# Altium PCB charging_board.PcbDoc
Units mm, origin at the board's own origin, x right, y up, seen from the top; angles counter-clockwise.
Board outline 35.32 x 30 mm, 2 copper layers (Top Layer, Bottom Layer); 2 components, 2 nets, 4 pads, 38 vias.
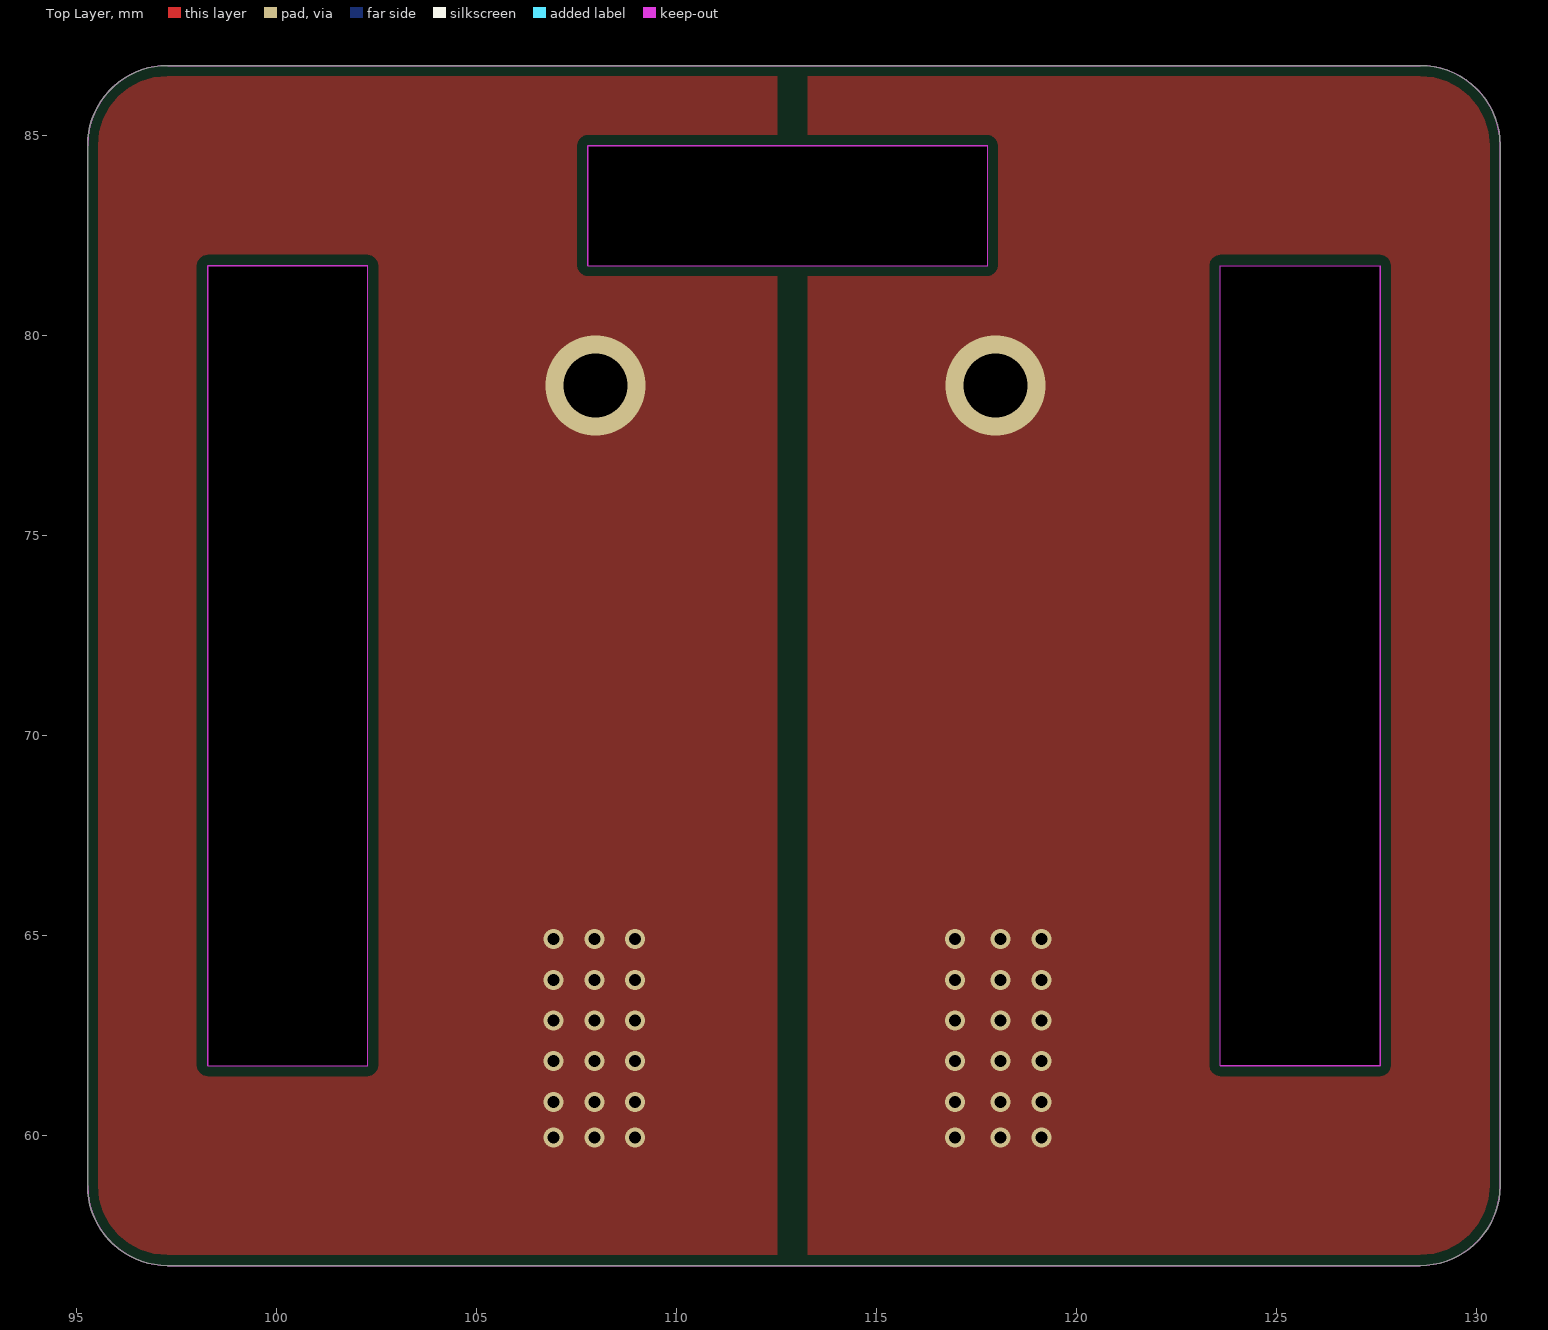
[diagram p0: Top Layer view]
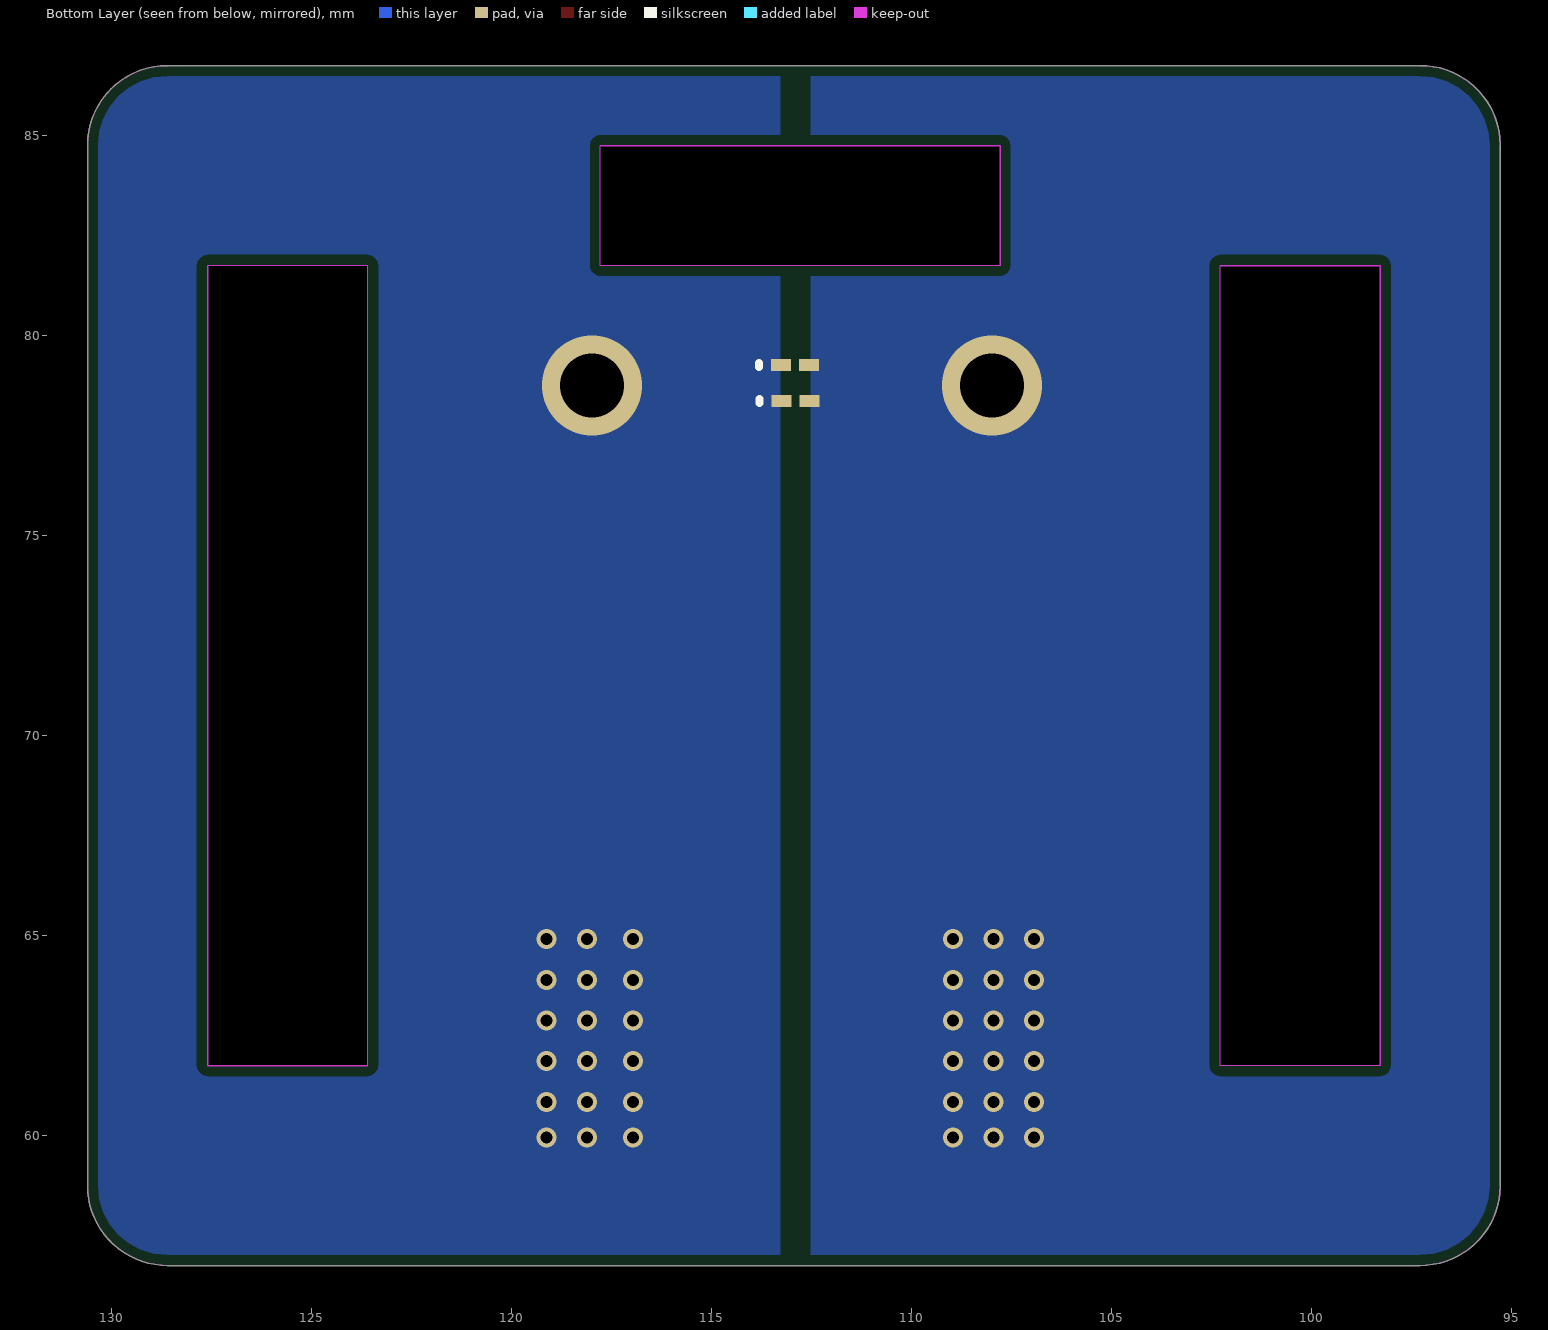
[diagram p1: Bottom Layer view, seen from below]

## Layer stack, top to bottom
Top Solder: solder mask 0.0102, Solder Resist, Dk 3.5
Top Layer: signal copper 0.0356
Dielectric 1: dielectric 0.32, FR-4, Dk 4.8
Bottom Layer: signal copper 0.0356
Bottom Solder: solder mask 0.0102, Solder Resist, Dk 3.5

## Board outline
95.28,58.74 ccw(c97.28,58.74) 97.28,56.74 128.598,56.74 ccw(c128.598,58.74) 130.598,58.74 130.598,84.74 ccw(c128.598,84.74) 128.598,86.74 97.28,86.74 ccw(c97.28,84.74) 95.28,84.74
cut-out: 123.598,61.74 123.598,81.74 127.598,81.74 127.598,61.74
cut-out: 107.78,81.74 117.78,81.74 117.78,84.74 107.78,84.74
cut-out: 98.28,61.74 102.28,61.74 102.28,81.74 98.28,81.74

## Design rules (kind name [scope] priority, off if disabled: settings)
Clearance [All] p1: gap=0.254 ignorepadtopadclearanceinfootprint=FALSE except(0: Arc-Hole Track-Hole SMDPad-Hole THPad-Hole Via-Hole Fill-Hole Poly-Hole Region-Hole Text-Hole; 0.127: SMDPad-SMDPad)
PolygonConnect [All] p1: connectstyle=Direct reliefconductorwidth=0.254 reliefentries=4 polygonreliefangle="90 Angle" airgapwidth=0.254
RoutingVias [All] p1: holewidth=0.711 width=1.27 viastyle="Through Hole" minholewidth=0.711 minwidth=1.27 maxholewidth=0.711 maxwidth=1.27
SolderMaskExpansion [All] p1: expansion=0.102 istentingtop=FALSE
Width [All] p1: maxlimit=0.254 minlimit=0.254 preferedwidth=0.254
30 further rules are at their usual default settings.

## Components (designator, comment, footprint, x,y, rotation, side; value= is the part's Value field where it differs from the comment)
C1 "F" 0603 112.903,78.359 r180 bottom
R1 "Ω" 0603 112.907,79.248 r180 bottom

## Footprints (in the part's own frame and the unit in brackets; to place one, negate y for a bottom-side part, rotate by r counter-clockwise, add the part's x,y. Pads: shape width x height; smd on the part's side, far side on the other; paste and mask are expansions set on the pad)
0603 [mm] "Chip Inductor, Body 0.6x0.3mm, IPC High Density"
  rect 0.5x0.3 smd: 1(-0.35,0) 2(0.35,0)
  silkscreen extent -0.9,-0.05 -0.9,0.05, body extent -0.33,-0.18 0.33,0.18, height 0.55

## Part data
C1: library part C0603, "0603封装电容"
R1: library part R0603, "0603封装电阻"

## Via types
v1: diameter 0.5, hole 0.3, Top Layer to Bottom Layer, 36 vias
v2: diameter 2.5, hole 1.6, Top Layer to Bottom Layer, 2 vias

## Nets (pads, with @x,y where several pads share a name; then routed paths per layer and width w, separated by ;. In a path a pad name is that pad's centre, name@x,y a point inside that pad or via, vN(x,y) a via of type N, cw(c..) or ccw(c..) an arc to the next point about the centre after c; other vN are vias at no path point)
GND: C1.1 R1.1
  other v1: 116.967,59.944 118.11,59.944 119.126,59.944 116.967,60.833 118.11,60.833 119.126,60.833 116.967,61.849 118.11,61.849 119.126,61.849 116.967,62.865 118.11,62.865 119.126,62.865 116.967,63.881 118.11,63.881 119.126,63.881 116.967,64.897 118.11,64.897 119.126,64.897
  other v2: 117.983,78.74
VCC: C1.2 R1.2
  other v1: 106.934,59.944 107.95,59.944 108.966,59.944 106.934,60.833 107.95,60.833 108.966,60.833 106.934,61.849 107.95,61.849 108.966,61.849 106.934,62.865 107.95,62.865 108.966,62.865 106.934,63.881 107.95,63.881 108.966,63.881 106.934,64.897 107.95,64.897 108.966,64.897
  other v2: 107.983,78.74

## Polygon pours and split planes (outlines as drawn)
GND on Top Layer "NONET_L-01_P-001" (solid, pour order 3): 113.284,86.741 130.556,86.741 130.556,56.769 113.284,56.769
VCC on Top Layer "NONET_L-01_P-001" (solid, pour order 2): 112.522,86.741 95.25,86.741 95.25,56.515 95.377,56.642 112.522,56.642
GND on Bottom Layer "NONET_L-01_P-001" (solid, pour order 1): 113.284,86.741 130.556,86.741 130.556,56.769 113.284,56.769
VCC on Bottom Layer "NONET_L-01_P-001" (solid, pour order 0): 112.522,86.868 95.25,86.868 95.25,56.642 95.377,56.769 112.522,56.769

## Keep-outs
Keep-Out Layer:
  lines w0.01: 95.28,58.74 ccw(c97.28,58.74) 97.28,56.74 128.598,56.74 ccw(c128.598,58.74) 130.598,58.74 130.598,84.74 ccw(c128.598,84.74) 128.598,86.74 97.28,86.74 ccw(c97.28,84.74) 95.28,84.74 95.28,58.74 ; 98.28,61.74 102.28,61.74 102.28,81.74 98.28,81.74 98.28,61.74 ; 107.78,81.74 117.78,81.74 117.78,84.74 107.78,84.74 107.78,81.74 ; 123.598,61.74 127.598,61.74 127.598,81.74 123.598,81.74 123.598,61.74

## Silkscreen, mask and mechanical layers (free items; w line width, h text height)
Top Solder:
  region: 116.459,65.468 116.459,59.372 119.634,59.372 119.634,65.468
  region: 106.426,65.468 106.426,59.372 109.601,59.372 109.601,65.468